# EAGLE board Adapter-SOT23-6 (EAGLE 5.06)
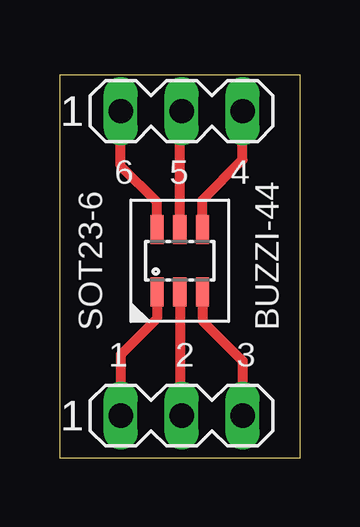
[diagram p0: board, top side]

Size 10 x 16 mm. Coordinates in mm from the lower left corner, seen from the top.
Outline: 0,0 0,16 10,16 10,0 0,0
Copper layers (1*16): Top 0.035mm / dielectric 1.5mm / Bottom 0.035mm
Design rules "PCB-POOL": minimum track width 6mil, minimum drill 12mil, track to track 6mil, track to pad 6mil, pad to pad 6mil, via to via 6mil, smd to smd 6mil, copper to edge 20mil, drill to drill 8mil, minimum pad ring 8mil, minimum via ring 6mil, stop-mask expansion 3mil, vias tented up to drill 0mil, thermal gap 8mil

## Footprints (pad centres in the part's own frame; a part is rotated, then mirrored left to right if it is on the bottom)
SOT23-6L = smd 0.55 x 1.2: 1 -0.95,-1.3; 2 0,-1.3; 3 0.95,-1.3; 4 0.95,1.3; 5 0,1.3; 6 -0.95,1.3
MA03-1 = drill 1.016 long: 1 -2.54,0; 2 0,0; 3 2.54,0

## Placement (x,y rotation side)
E$1  [SOT23-6L]  5,8.24 0 top
E$2  [MA03-1]  5.08,14.48 0 top
E$3  [MA03-1]  5.08,1.78 0 top

## Library data of the parts
E$1 = turbod3
E$2 E$3 = con-lstb

## Nets
S$1: E$1.6 E$2.1
S$2: E$1.5 E$2.2
S$3: E$1.4 E$2.3
S$4: E$1.1 E$3.1
S$5: E$1.2 E$3.2
S$6: E$1.3 E$3.3

## Tracks (layer width: path | path; a pad name or v marks a point on that pad's centre or on a via)
S$1
  Top 0.406: E$1.6 4.05,10.68 2.54,12.19 2.54,14.22 2.79,14.48 E$2.1
S$2
  Top 0.406: E$1.5 5,14.4 E$2.2
S$3
  Top 0.406: E$1.4 5.95,10.78 7.62,12.45 E$2.3
S$4
  Top 0.406: E$1.1 4.05,5.83 2.54,4.32 E$3.1 2.54,1.52
S$5
  Top 0.406: E$1.2 5,1.86 E$3.2
S$6
  Top 0.406: E$1.3 5.95,5.73 7.62,4.06 E$3.3 7.62,1.52

## Text on the board
tNames: 6 | 5 | 4 | SOT23-6 | BUZZI-44 | 1 | 2 | 3